# EAGLE board lab1sol (EAGLE 8.7.1)
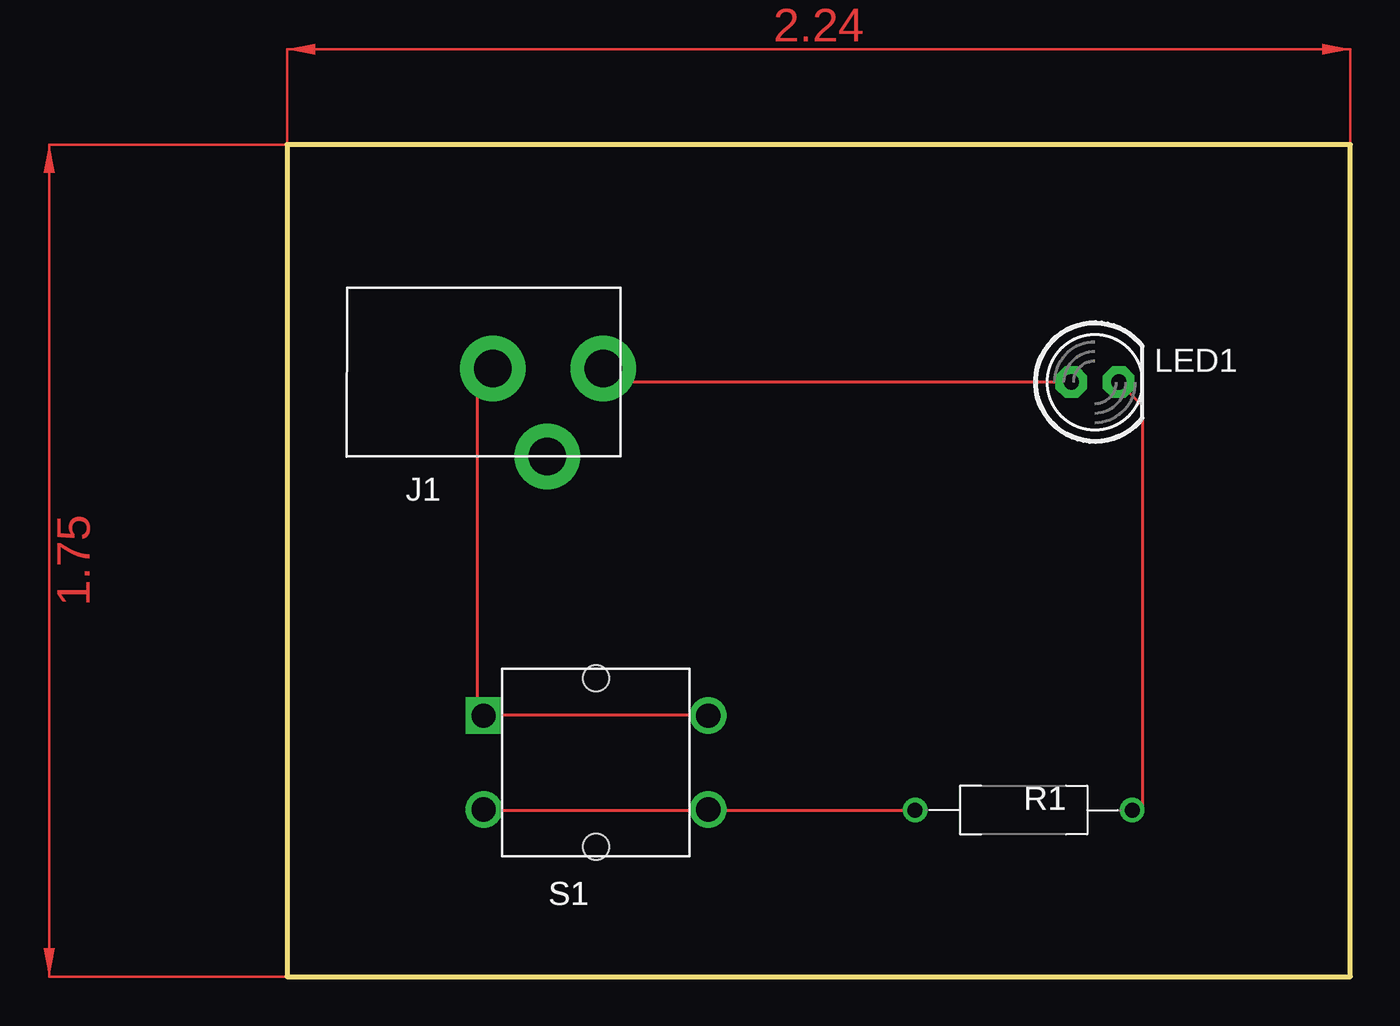
[diagram p0: board, top side]
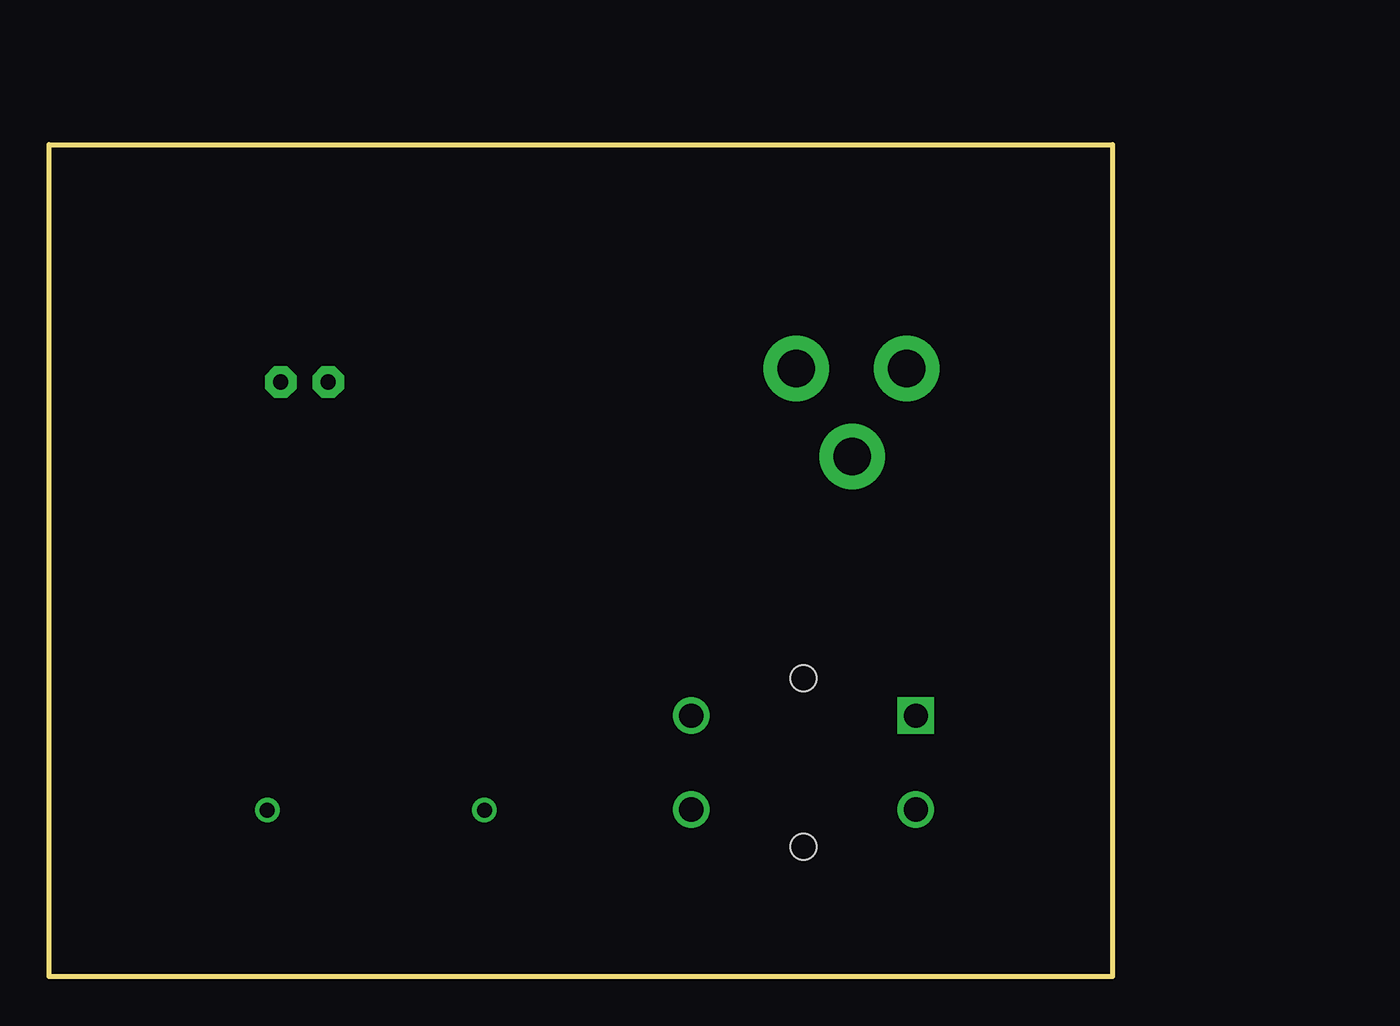
[diagram p1: board, bottom side, seen from below]

Size 56.82 x 44.44 mm. Coordinates in mm from the lower left corner, seen from the top.
Outline: 0,0 56.82,0 56.82,44.44 0,44.44 0,0
Copper layers (1*16): Top 0.035559375mm / dielectric 1.501140625mm / Bottom 0.035559375mm
Design rules "4pcb-33board": minimum track width 6mil, minimum drill 15mil, track to track 6mil, track to pad 6mil, pad to pad 6mil, via to via 6mil, smd to smd 6mil, copper to edge 10mil, drill to drill 10mil, minimum pad ring 10mil, minimum via ring 8mil, stop-mask expansion 4mil, vias tented up to drill 0mil, thermal gap 10mil

## Footprints (pad centres in the part's own frame; a part is rotated, then mirrored left to right if it is on the bottom)
PJ-102A = drill 2 pad 3.5: RING -6.77,-4.345; RING_SW -3.87,-9.045; TIP -0.87,-4.345
LED5MM = drill 0.813 pad 1.676 octagon: A -1.27,0; K 1.27,0
RESAD1160W55L680D260_HS = drill 0.8 pad 1.2: 1 -5.8,0; 2 5.8,0
BUTTON-TACTILE-SQUARE-ADAFRUIT1010 = drill 1.3 square: P -6,2.5 | drill 1.3: P2 6,2.5; S -6,-2.5; S2 6,-2.5 | hole 1.4: 0,-4.5; 0,4.5

## Placement (x,y rotation side)
J1  2.1MMJACKTHM  [PJ-102A]  17.78,36.83 0 top
LED1  Red  [LED5MM]  43.18,31.75 0 top
R1  330Ohms  [RESAD1160W55L680D260_HS]  39.37,8.89 0 top
S1  BUTTON-TACTILE-SQUARE  [BUTTON-TACTILE-SQUARE-ADAFRUIT1010]  16.51,11.43 0 top

## Library data of the parts
J1 = Lab01; CREATOR: Swanson; DIST: Digikey; DISTPN: CP-102A-ND; REVIEWER: Swanson
LED1 = Lab01; CREATOR: Swanson; DIST: Adafruit; DISTPN: 297; REVIEWER: Swanson
R1 = Lab01; CREATOR: Swanson; DIST: Digikey; DISTPN: 100QTR-ND; REVIEWER: Swanson
S1 = Lab01; CREATOR: Swanson; DIST: Adafruit; DISTPN: 1010; REVIEWER: Swanson

## Nets
N$1: LED1.K R1.2
N$2: R1.1 S1.S S1.S2
N$3: J1.RING S1.P S1.P2
N$4: J1.TIP LED1.A

## Tracks (layer width: path | path; a pad name or v marks a point on that pad's centre or on a via)
N$1
  Top 0.152: R1.2 45.72,8.89 45.72,30.48 LED1.K
N$2
  Top 0.152: R1.1 22.86,8.89 S1.S2 21.59,8.89 11.43,8.89 S1.S
  Bottom 0.152: 22.86,8.89 S1.S2
N$3
  Top 0.152: J1.RING 10.16,31.75 10.16,13.97 S1.P 11.43,13.97 21.59,13.97 S1.P2
N$4
  Top 0.152: J1.TIP 17.78,31.75 LED1.A
  Bottom 0.152: 17.78,31.75 J1.TIP
(copper drawn outside any net)
  shapes: Top area x2